# Altium PCB BRK7010.PcbDoc
Units mil, origin at the board's own origin, x right, y up, seen from the top; angles counter-clockwise.
Board outline 4724.41 x 3149.61 mil, 2 copper layers (Top Layer, Bottom Layer), stack 60.5 mil thick; 29 components, 139 nets, 372 pads, 81 vias.
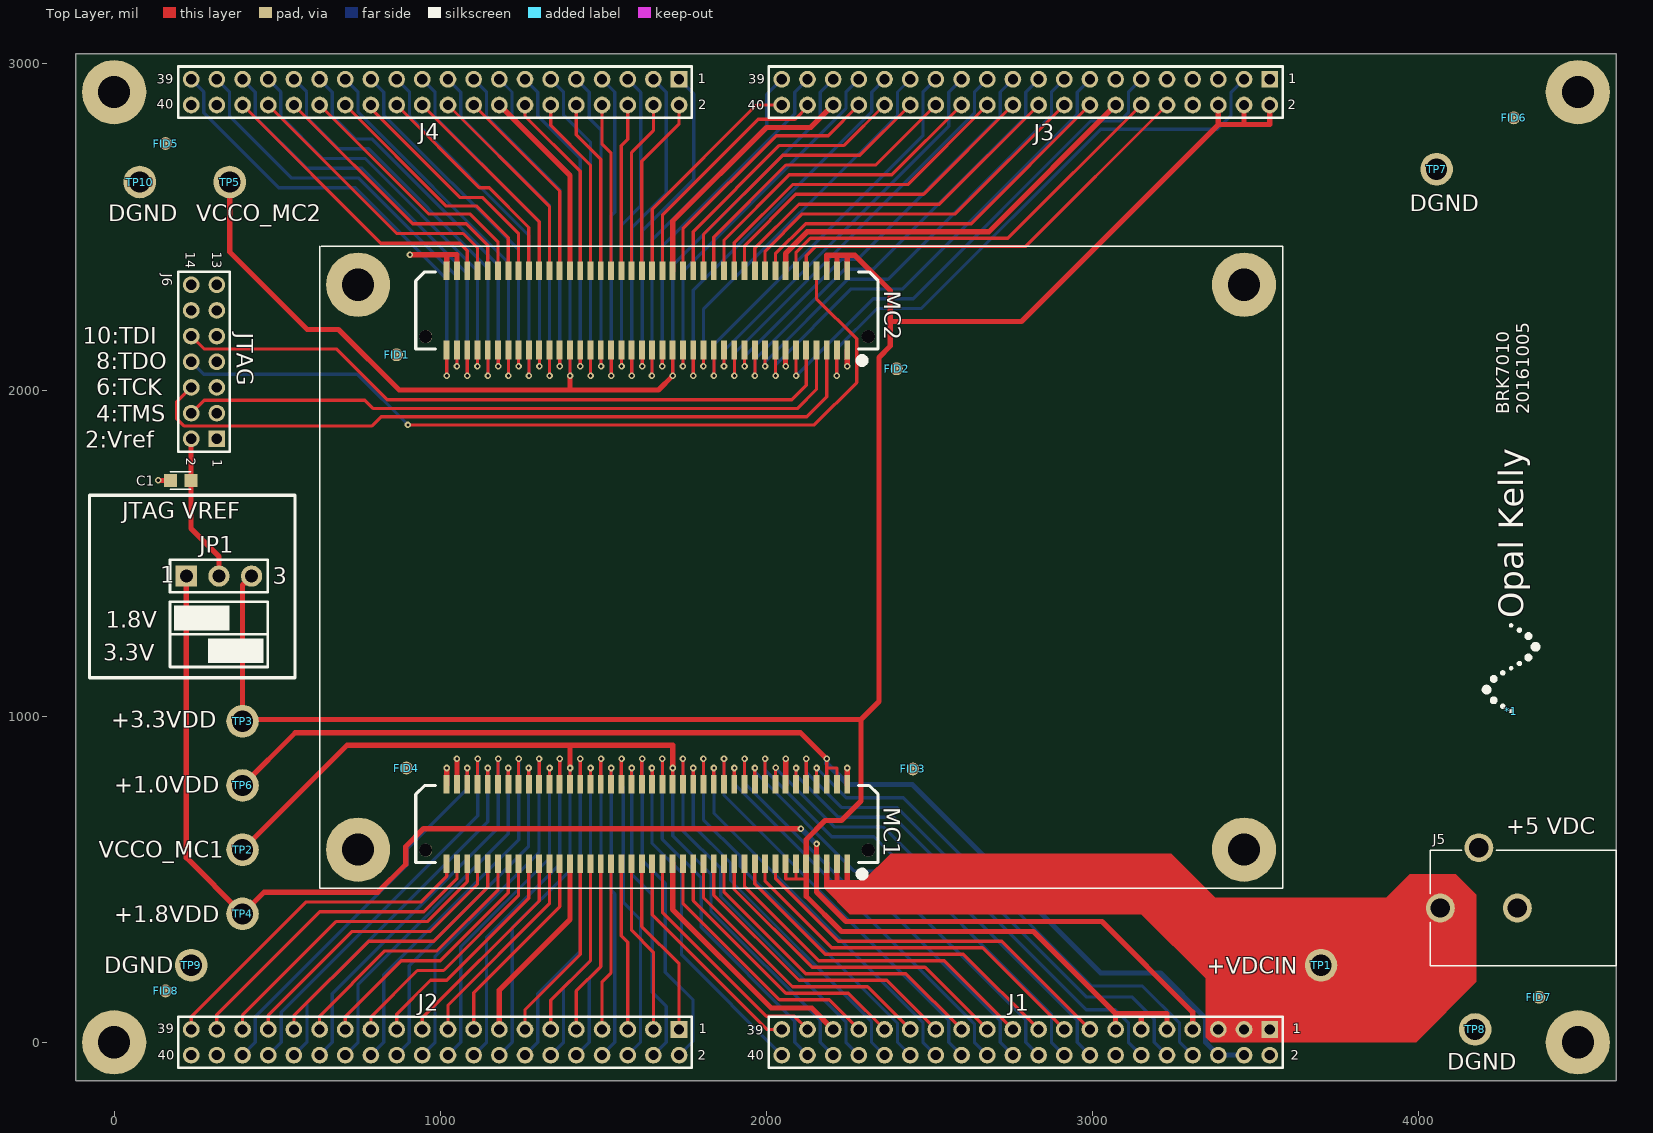
[diagram p0: Top Layer view]
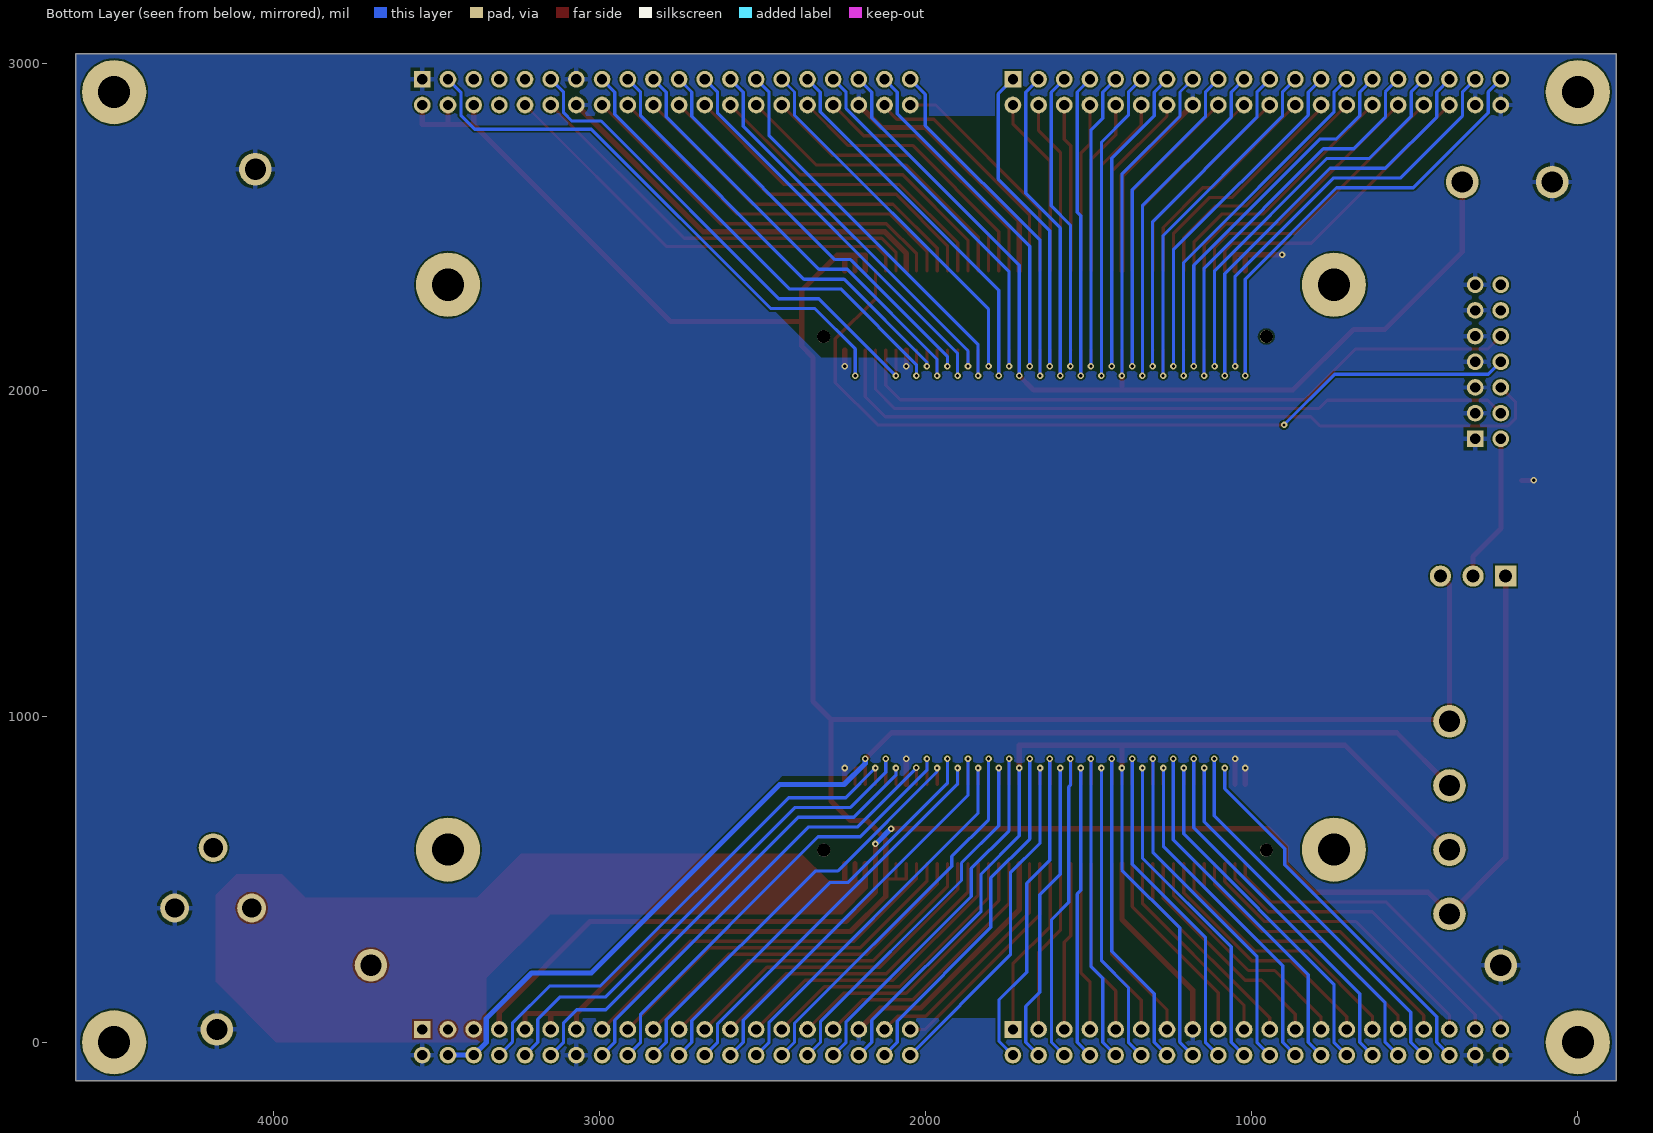
[diagram p1: Bottom Layer view, seen from below]

## Layer stack, top to bottom
Top Solder: solder mask 0.4, Solder Resist, Dk 3.5
Top Layer: signal copper 1.4
Dielectric1: core 57.7, IT-180A, Dk 4.8
Bottom Layer: signal copper 1.4
Bottom Solder: solder mask 0.4, Solder Resist, Dk 3.5

## Board outline
-118.11,-118.11 -118.11,3031.5 4606.3,3031.5 4606.3,-118.11

## Design rules (kind name [scope] priority, off if disabled: settings)
Clearance [All] p1: gap=5 ignorepadtopadclearanceinfootprint=FALSE except(0: Arc-Hole Track-Hole SMDPad-Hole THPad-Hole Via-Hole Fill-Hole Poly-Hole Region-Hole Text-Hole; 15: Fill-Fill Fill-Poly Fill-Region Poly-Poly Poly-Region Region-Region)
FabricationTestPointUsage TestPointUsage [All] p1: valid=0 allowmultiple=FALSE
FabricationTestpoint Testpoint [All] p1: side=3 testpointundercomponent=TRUE minsize=40 maxsize=100 preferedsize=60 minholesize=0 maxholesize=40 preferedholesize=32 testpointgrid=1 allowsidetop=TRUE allowsidebottom=TRUE usegrid=TRUE gridtolerance=0.01
HoleSize [All] p1: absolutevalues=TRUE maxlimit=236.22 minlimit=10 maxpercent=80.000 minpercent=20.000
MinimumSolderMaskSliver [All] p1: minsoldermaskwidth=3
PlaneConnect [All] p1: planeconnectstyle=Relief reliefexpansion=20 reliefentries=4 reliefconductorwidth=15 reliefairgap=10
PolygonConnect "Via Connect" [IsVia] p1: connectstyle=Direct reliefconductorwidth=10 reliefentries=4 polygonreliefangle="90 Angle" airgapwidth=10
PolygonConnect [All] p2: connectstyle=Relief reliefconductorwidth=15 reliefentries=4 polygonreliefangle="90 Angle" airgapwidth=10
RoutingVias [All] p1: holewidth=15 width=25 viastyle="Through Hole" minholewidth=10 minwidth=20 maxholewidth=50 maxwidth=100
SilkToSilkClearance [All] p1: silktosilkclearance=0.1
SilkToSolderMaskClearance SilkscreenOverComponentPads [IsPad] p1: minsilkscreentomaskgap=3 clearancetoexposedcopper=TRUE
SolderMaskExpansion [All] p1: expansion=4
Width okWidthPower [InNetClass('Power')] p1: maxlimit=100 minlimit=10 preferedwidth=10 minimp=50.000000 maximp=50.000000 favimp=50.000000
Width [All] p2: maxlimit=40 minlimit=6 preferedwidth=7 minimp=50.000000 maximp=50.000000 favimp=50.000000
23 further rules are at their usual default settings.

## Components (designator, comment, footprint, x,y, rotation, side; value= is the part's Value field where it differs from the comment)
*1 "Opal Kelly Logo" okLogo-23x5 4283.46,1015.75 r90 top
C1 "C0603C104K4RACTU" CAPC1608N 204,1723 r0 top value="0.1 u"
FID1 "FIDUCIAL" FID1MM/2MM-SS 866,2108 r90 top
FID2 "FIDUCIAL" FID1MM/2MM-SS 2399,2065 r90 top
FID3 "FIDUCIAL" FID1MM/2MM-SS 2449,838 r90 top
FID4 "FIDUCIAL" FID1MM/2MM-SS 896,841 r90 top
FID5 "FIDUCIAL" FID1MM/2MM-SS 157.48,2755.91 r90 top
FID6 "FIDUCIAL" FID1MM/2MM-SS 4291.34,2834.65 r90 top
FID7 "FIDUCIAL" FID1MM/2MM-SS 4369,138 r90 top
FID8 "FIDUCIAL" FID1MM/2MM-SS 157.48,157.48 r90 top
J1 "0877584016" HDR2X20-2MM 2795.28,0 r180 top locked
J2 "0877584016" HDR2X20-2MM 984.25,0 r180 top locked
J3 "0877584016" HDR2X20-2MM 2795.28,2913.39 r180 top locked
J4 "0877584016" HDR2X20-2MM 984.25,2913.39 r180 top locked
J5 "PJ-102AH" CUI-PJ102A 4605.83,411.5 r90 top
J6 "87831-1420" HDR2X7-2MM 275.59,2086.61 r90 top
JP1 "PBC03SAAN" HDR1X3 221.33,1429.58 r0 top
MC1 "BTE-040-01-F-D-A" BTE-040 1633.86,669.29 r180 top locked
MC2 "BTE-040-01-F-D-A" BTE-040 1633.86,2244.09 r180 top locked
TP1 "+VDCIN" TP-PTH-65/100 3700.79,236.22 r90 top
TP2 "VCCO_MC1" TP-PTH-65/100 393.7,590.55 r90 top
TP3 "+3.3VDD" TP-PTH-65/100 393.7,984.25 r90 top
TP4 "+1.8VDD" TP-PTH-65/100 393.7,393.7 r90 top
TP5 "VCCO_MC2" TP-PTH-65/100 354.33,2637.8 r90 top
TP6 "+1.0VDD" TP-PTH-65/100 393.7,787.4 r90 top
TP7 "DGND" TP-PTH-65/100 4055.12,2677.17 r90 top
TP8 "DGND" TP-PTH-65/100 4173.23,39.37 r90 top
TP9 "DGND" TP-PTH-65/100 236.22,236.22 r90 top
TP10 "DGND" TP-PTH-65/100 78.74,2637.8 r90 top

## Footprints (in the part's own frame and the unit in brackets; to place one, negate y for a bottom-side part, rotate by r counter-clockwise, add the part's x,y. Pads: shape width x height; smd on the part's side, far side on the other; paste and mask are expansions set on the pad)
BTE-040 [mm] "0.8mm Samtech socket"
  rect 0.46x1.45 smd: 1(-15.6,3.085) 2(-15.6,-3.085) 3(-14.8,3.085) 4(-14.8,-3.085) 5(-14,3.085) 6(-14,-3.085) 7(-13.2,3.085) 8(-13.2,-3.085) 9(-12.4,3.085) 10(-12.4,-3.085) 11(-11.6,3.085) 12(-11.6,-3.085) 13(-10.8,3.085) 14(-10.8,-3.085) 15(-10,3.085) 16(-10,-3.085) 17(-9.2,3.085) 18(-9.2,-3.085) 19(-8.4,3.085) 20(-8.4,-3.085) 21(-7.6,3.085) 22(-7.6,-3.085) 23(-6.8,3.085) 24(-6.8,-3.085) 25(-6,3.085) 26(-6,-3.085) 27(-5.2,3.085) 28(-5.2,-3.085) 29(-4.4,3.085) 30(-4.4,-3.085) 31(-3.6,3.085) 32(-3.6,-3.085) 33(-2.8,3.085) 34(-2.8,-3.085) 35(-2,3.085) 36(-2,-3.085) 37(-1.2,3.085) 38(-1.2,-3.085) 39(-0.4,3.085) 40(-0.4,-3.085) 41(0.4,3.085) 42(0.4,-3.085) 43(1.2,3.085) 44(1.2,-3.085) 45(2,3.085) 46(2,-3.085) 47(2.8,3.085) 48(2.8,-3.085) 49(3.6,3.085) 50(3.6,-3.085) 51(4.4,3.085) 52(4.4,-3.085) 53(5.2,3.085) 54(5.2,-3.085) 55(6,3.085) 56(6,-3.085) 57(6.8,3.085) 58(6.8,-3.085) 59(7.6,3.085) 60(7.6,-3.085) 61(8.4,3.085) 62(8.4,-3.085) 63(9.2,3.085) 64(9.2,-3.085) 65(10,3.085) 66(10,-3.085) 67(10.8,3.085) 68(10.8,-3.085) 69(11.6,3.085) 70(11.6,-3.085) 71(12.4,3.085) 72(12.4,-3.085) 73(13.2,3.085) 74(13.2,-3.085) 75(14,3.085) 76(14,-3.085) 77(14.8,3.085) 78(14.8,-3.085) 79(15.6,3.085) 80(15.6,-3.085)
  round 1.02 hole 1.02: 81(-17.235,2.035) 82(17.235,2.035)
  silkscreen extent -18,-3 18,4.15
CAPC1608N [mm] "Chip Capacitor, Body 1.6x0.8mm, IPC Medium Density"
  rect 1x1 smd: 1(-0.8,0) 2(0.8,0)
  silkscreen extent -0.8,-0.68 0.8,0.68, body extent -0.87,-0.48 0.87,0.48, height 0.85
CUI-PJ102A [mm] "2.1mm/5.5mm DC power jack"
  round 2.25 hole 1.5: 1(0,13.7) 2(0,7.7) 3(4.7,10.7)
  silkscreen extent -4.5,0 4.5,14.5
FID1MM/2MM-SS [mm] "Fiducial 1mm copper, 2mm soldermask, single-side"
  round 1 smd paste-0.5 mask+0.5: FID?(0,0)
HDR1X3 [mil] ".1\" 1x3 Header"
  rect 65x65 hole 40: 1(0,0)
  round 65 hole 40: 2(100,0) 3(200,0)
  silkscreen extent -50,-50 250,50
HDR2X7-2MM [mm] "2mm 2x7 header"
  rect 1.3x1.3 hole 0.8: 1(-6,-1)
  round 1.3 hole 0.8: 2(-6,1) 3(-4,-1) 4(-4,1) 5(-2,-1) 6(-2,1) 7(0,-1) 8(0,1) 9(2,-1) 10(2,1) 11(4,-1) 12(4,1) 13(6,-1) 14(6,1)
  silkscreen extent -7,-2 7,2
HDR2X20-2MM [mm] "2mm 2x20 header"
  rect 1.3x1.3 hole 0.8: 1(-19,-1)
  round 1.3 hole 0.8: 2(-19,1) 3(-17,-1) 4(-17,1) 5(-15,-1) 6(-15,1) 7(-13,-1) 8(-13,1) 9(-11,-1) 10(-11,1) 11(-9,-1) 12(-9,1) 13(-7,-1) 14(-7,1) 15(-5,-1) 16(-5,1) 17(-3,-1) 18(-3,1) 19(-1,-1) 20(-1,1) 21(1,-1) 22(1,1) 23(3,-1) 24(3,1) 25(5,-1) 26(5,1) 27(7,-1) 28(7,1) 29(9,-1) 30(9,1) 31(11,-1) 32(11,1) 33(13,-1) 34(13,1) 35(15,-1) 36(15,1) 37(17,-1) 38(17,1) 39(19,-1) 40(19,1)
  silkscreen extent -20,-2 20,2
okLogo-23x5 [mil] "Opal Kelly silkscreen logo (23mm x 5mm)"
  silkscreen extent -3,-82 266,82
TP-PTH-65/100 [mil] "Test point, plated through-hole, 65/100mil"
  round 100 hole 65: 1(0,0)

## Part data
*1: library part OKLOGO
C1: library part 000019, "Ceramic capacitor", Manufacturer=Kemet, ValueFloat=1E-7, Description 2="SM-0603, 10%, 16v, X7R", Manufacturer_PN=C0603C104K4RACTU, partnumber=000019, updated_on="11/23/2015 9:32:03 AM"
FID1 FID2 FID3 FID4 FID5 FID6 FID7 FID8: "PCB fiducial"
J1 J2 J3 J4: library part 000583, "2mm header, 20x2, thru-hole", Manufacturer=Molex, Manufacturer_PN=0877584016, NoLoad=NoLoad, partnumber=000583, updated_on="1/24/2015 12:30:40 PM"
J5: library part 000356, "DC power connector - high current", Manufacturer="CUI Inc.", Description 2="2.1mm / 5.5mm", Manufacturer_PN=PJ-102AH, partnumber=000356, updated_on="3/10/2016 9:16:59 AM"
J6: library part 000541, "2mm header, shrouded", Manufacturer=Molex, Description 2="Dual-row, 14-pos, Xilinx JTAG compatible", Manufacturer_PN=87831-1420, partnumber=000541, updated_on="9/27/2016 12:10:17 PM"
JP1: library part 001173, "Single-row header", Manufacturer="Sullins Electronics Corp.", Description 2="Male, 0.1\", 3-pos", Manufacturer_PN=PBC03SAAN, partnumber=001173, updated_on="1/24/2015 12:32:02 PM"
MC1 MC2: library part 000059, "0.8mm high-density header", Manufacturer=Samtec, Description 2="80-pin, Gold flash, Mated height: 5.00mm (0.197 inch)", Manufacturer_PN=BTE-040-01-F-D-A, partnumber=000059, updated_on="1/18/2016 3:47:24 PM"
TP1 TP2 TP3 TP4 TP5 TP6 TP7 TP8 TP9 TP10: library part TP-PTH-65/100, "Test point, plated through-hole, 65/100mil"

## Free pads (board coordinates)
  round 196.85 hole 98.43: 0(0,0) 0(0,2913.39) 0(4488.19,0) 0(4488.19,2913.39) MH(748.03,590.55) MH(748.03,2322.83) MH(3464.57,590.55) MH(3464.57,2322.83)

## Via types
v1: diameter 20, hole 10, Top Layer to Bottom Layer, 81 vias

## Nets (pads, with @x,y where several pads share a name; then routed paths per layer and width w, separated by ;. In a path a pad name is that pad's centre, name@x,y a point inside that pad or via, vN(x,y) a via of type N, cw(c..) or ccw(c..) an arc to the next point about the centre after c; other vN are vias at no path point)
+1.0VDD: J1.4 J1.6 MC1.4 MC1.6 TP6.1 | length 3758.5
  Top Layer w10: MC1.6 2185.04,841 ; v1(2185,869) v1(2185,869) 2185.04,841 ; MC1.4 2216.54,841 2185.04,841
  Top Layer w16: TP6.1 555.3,949 2105,949 v1(2185,869)
  Bottom Layer w16: v1(2185,869) 2185,855 2250,790 2447,790 3025,212 3208,212 3347,73 3347,-0.54 J1.6 J1.4
+1.8VDD: J1.7 JP1.1 MC1.7 TP4.1 | length 4533.4
  Top Layer w16: JP1.1 221.33,566.07 TP4.1 460,460 808,460 894,546 894,600 949,655 v1(2106,655) ; v1(2154,608) 2153.54,607.54 MC1.7 2153.54,460.46 2244,370 3029,370 3307.09,91.91 J1.7
  Bottom Layer w16: v1(2106,655) 2153,608 v1(2154,608)
+3.3VDD: J1.9 J1.11 J1.13 J3.2 J3.4 J3.6 JP1.3 MC1.9 MC1.11 MC1.13 MC2.2 MC2.4 MC2.6 TP3.1 | length 7883
  Top Layer w10: MC1.13 2059.05,501 2090.55,501 ; MC1.11 2090.55,501 ; 2122.05,501 2090.55,501
  Top Layer w16: JP1.3 393.7,1401.95 TP3.1 399.45,990 2290,990 ; MC2.6 2185.04,2413 2216.54,2413 ; MC2.4 2216.54,2413 ; MC2.2 2248.03,2413 ; J1.13 3070.87,88.13 ; J1.11 3149.61,88.13 ; J1.9 3228.35,88.13 3149.61,88.13 ; J3.6 3385.83,2813.83 ; J3.4 3464.57,2813.83 ; J3.2 3543.31,2813.83 3464.57,2813.83 ; 2216.54,2413 2248.03,2413 ; 2248.03,2413 2272,2413 2380,2305 2380,2210 ; 2290,990 2345,1045 2345,2100 2380,2135 2380,2210 ; 2290,990 2290,740 2230,680 2180,680 2122.05,622.05 MC1.9 2122.05,501 2122.05,447.95 2230,340 2819,340 3070.87,88.13 ; 2380,2210 2782,2210 3385.83,2813.83 ; 3070.87,88.13 3149.61,88.13 ; 3385.83,2813.83 3464.57,2813.83
+VCCBATT: J3.3 MC2.3 | length 1793.6
  Top Layer w10: v1(2216,2044) 2216,2122.1 MC2.3
  Bottom Layer w10: v1(2216,2044) 2216,2126 2340,2250 2475,2250 3025,2800 3383,2800 3425,2842 3425,2913.19 J3.3
+VDCIN: J1.1 J1.3 J1.5 J5.1 MC1.1 MC1.3 MC1.5 TP1.1 | length 2346.7
  Top Layer w16: MC1.5 2185.04,480.96 2214,452 ; MC1.3 2216.54,454.54 2214,452 ; MC1.1 2248.03,426.03 2244,422 ; J5.1 3891.18,236.22 TP1.1 3515.01,422 2244,422 ; 2214,452 2244,422
DGND: C1.1 J1.2 J1.14 J1.35 J2.15 J2.38 J2.40 J3.1 J3.13 J3.14 J3.36 J4.16 J4.38 J4.40 J5.2 J6.1 J6.3 J6.5 J6.7 J6.9 J6.11 J6.13 MC1.2 MC1.14 MC1.35 MC1.55 MC1.78 MC1.80 MC2.1 MC2.13 MC2.14 MC2.36 MC2.56 MC2.78 MC2.80 TP7.1 TP8.1 TP9.1 TP10.1 | length 4663.9
  Top Layer w16: v1(135,1723) C1.1 ; v1(907,2415) 1018.11,2415 ; MC1.80 1019.68,840.68 v1(1020,841) ; MC2.80 1019.68,2415.71 1051.18,2415.71 MC2.78 ; v1(1051,869) 1051.18,868.82 MC1.78 ; J2.15 1181.1,160.1 1397.64,376.64 MC1.55 ; J4.16 1397.64,2657.48 MC2.56 ; MC1.35 1712.6,407.4 2015,105 2139.09,105 J1.35 ; MC2.36 1712.6,2517.6 2000,2805 2135.71,2805 J3.36 ; v1(2059,869) v1(2059,869) MC1.14 ; v1(2059,2073) 2059,2122.58 MC2.13 ; MC2.14 2059.05,2419.05 2125,2485 2681.85,2485 J3.14 ; MC1.2 v1(2248,841) ; v1(2248,2073) MC2.1@2248,2122.61
FPGA_TCK: J6.6 MC2.5 | length 2297.7
  Top Layer w10: J6.6 191,1962.65 191,1913 214,1890 791,1890 819,1918 2124.04,1918 2185.04,1979 MC2.5
FPGA_TDI: J6.10 MC2.9 | length 2093.6
  Top Layer w10: J6.10 275.57,2126 681,2126 837,1970 2078.05,1970 2122.05,2014 MC2.9
FPGA_TDO: J6.8 MC2.8 | length 2568.5
  Top Layer w10: v1(901,1893) 2147,1893 2277,2023 2277,2157 2153.54,2280.46 MC2.8
  Bottom Layer w10: J6.8 274.83,2048 746,2048 v1(901,1893)
FPGA_TMS: J6.4 MC2.7 | length 2089.9
  Top Layer w10: J6.4 276.09,1969 769,1969 795,1943 2095,1943 2153.54,2001.54 MC2.7
MC1_15: J1.15 MC1.15 | length 1201.8
  Top Layer w10: MC1.15 2027.56,502.44 2220,310 2721.5,310 J1.15
MC1_16: J1.16 MC1.16 | length 1420.6
  Top Layer w10: MC1.16 2027.56,840.56 v1(2029,842)
  Bottom Layer w10: v1(2029,842) 2029,840 2209,660 2360,660 2953,67 2953,-0.24 J1.16
MC1_17: J1.17 MC1.17 | length 1159.5
  Top Layer w10: MC1.17 1996.06,493.94 2200,290 2662.76,290 J1.17
MC1_18: J1.18 MC1.18 | length 1442.8
  Top Layer w10: v1(1996,869) v1(1996,869) MC1.18
  Bottom Layer w10: v1(1996,869) 1996,834 2200,630 2330,630 2874,86 2874,0.02 J1.18
MC1_19: J1.19 MC1.19 | length 1117.2
  Top Layer w10: MC1.19 1964.57,485.43 2180,270 2604.02,270 J1.19
MC1_20: J1.20 MC1.20 | length 1331.4
  Top Layer w10: MC1.20 1964.57,840.57 v1(1965,841)
  Bottom Layer w10: v1(1965,841) 1965,830 2270,525 2339,525 2795,69 2795,0.28 J1.20
MC1_21: J1.21 MC1.21 | length 1075
  Top Layer w10: MC1.21 1933.07,476.93 2160,250 2545.28,250 J1.21
MC1_22: J1.22 MC1.22 | length 1360.3
  Top Layer w10: v1(1933,869) 1933.07,868.93 MC1.22
  Bottom Layer w10: v1(1933,869) 1933,794 2237,490 2293,490 2717,66 2717,-0.46 J1.22
MC1_23: J1.23 MC1.23 | length 1032.7
  Top Layer w10: MC1.23 1901.57,468.43 2140,230 2486.54,230 J1.23
MC1_24: J1.24 MC1.24 | length 1251.9
  Top Layer w10: MC1.24 1901.57,840.57 v1(1902,841)
  Bottom Layer w10: v1(1902,841) 1902,793 2638,57 2638,-0.2 J1.24
MC1_25: J1.25 MC1.25 | length 990.5
  Top Layer w10: MC1.25 1870.08,459.92 2120,210 2427.8,210 J1.25
MC1_26: J1.26 MC1.26 | length 1288.4
  Top Layer w10: v1(1870,869) 1870.08,868.92 MC1.26
  Bottom Layer w10: v1(1870,869) 1870,757 2559,68 2559,0.06 J1.26
MC1_27: J1.27 MC1.27 | length 948.2
  Top Layer w10: MC1.27 1838.58,451.42 2100,190 2369.06,190 J1.27
MC1_28: J1.28 MC1.28 | length 1212.7
  Top Layer w10: MC1.28 1838.58,840.58 v1(1839,841)
  Bottom Layer w10: v1(1839,841) 1839,703 2480,62 2480,0.32 J1.28
MC1_29: J1.29 MC1.29 | length 905.9
  Top Layer w10: MC1.29 1807.09,442.91 2080,170 2310.32,170 J1.29
MC1_30: J1.30 MC1.30 | length 1249.2
  Top Layer w10: v1(1807,869) 1807.09,868.91 MC1.30
  Bottom Layer w10: v1(1807,869) 1807,683 1920,570 1920,540 2402,58 2402,-0.43 J1.30
MC1_31: J1.31 MC1.31 | length 863.7
  Top Layer w10: MC1.31 1775.59,434.41 2060,150 2251.57,150 J1.31
MC1_32: J1.32 MC1.32 | length 1173.6
  Top Layer w10: MC1.32 1775.59,840.59 v1(1776,841)
  Bottom Layer w10: v1(1776,841) 1776,664 1890,550 1890,496 2322,64 2322,0.83 J1.32
MC1_33: J1.33 MC1.33 | length 821.4
  Top Layer w10: MC1.33 1744.09,425.91 2040,130 2192.83,130 J1.33
MC1_34: J1.34 MC1.34 | length 1210.1
  Top Layer w10: v1(1744,869) 1744.09,868.91 MC1.34
  Bottom Layer w10: v1(1744,869) 1744,649 1860,533 1860,447 2244,63 2244,0.09 J1.34
MC1_37: J1.37 MC1.37 | length 742.7
  Top Layer w10: MC1.37 1681.1,398.9 2000,80 2085.35,80 J1.37
MC1_38: J1.38 MC1.38 | length 1171
  Top Layer w10: v1(1681,869) 1681.1,868.9 MC1.38
  Bottom Layer w10: v1(1681,869) 1681,623 1800,504 1800,352 2087,65 2087,-0.39 J1.38
MC1_39: J1.39 MC1.39 | length 700.5
  Top Layer w10: MC1.39 1649.61,390.39 2000.63,39.37 J1.39
MC1_40: J1.40 MC1.40 | length 1095.8
  Top Layer w10: v1(1649,841) 1649.61,840.39 MC1.40
  Bottom Layer w10: v1(1649,841) 1649,611 1740,520 1740,267.87 J1.40
MC1_41: J2.1 MC1.41 | length 555.8
  Top Layer w10: MC1.41 1618.11,354.89 1732.28,240.72 J2.1
MC1_42: J2.2 MC1.42 | length 1069.3
  Top Layer w10: MC1.42 1618.11,868.11 v1(1619,869)
  Bottom Layer w10: v1(1619,869) 1619,558 1690,487 1690,215 1775,130 1775,3.35 J2.2
MC1_43: J2.3 MC1.43 | length 536.2
  Top Layer w10: MC1.43 1586.61,343.39 1653.54,276.46 J2.3
MC1_44: J2.4 MC1.44 | length 991
  Top Layer w10: MC1.44 1586.61,840.61 v1(1587,841)
  Bottom Layer w10: v1(1587,841) 1587,515 1650,452 1650,153 1693,110 1693,0.09 J2.4
MC1_45: J2.5 MC1.45 | length 516.6
  Top Layer w10: MC1.45 1555.12,326.88 1574.8,307.2 J2.5
MC1_46: J2.6 MC1.46 | length 1027.2
  Top Layer w10: MC1.46 1555.12,868.12 v1(1556,869)
  Bottom Layer w10: v1(1556,869) 1556,788 1561,783 1561,429 1614,376 1614,-0.17 J2.6
MC1_47: J2.7 MC1.47 | length 519.9
  Top Layer w10: J2.7 1496.06,186.06 1523.62,213.62 MC1.47
MC1_48: J2.8 MC1.48 | length 951.5
  Top Layer w10: MC1.48 1523.62,840.62 v1(1524,841)
  Bottom Layer w10: J2.8 1535,-0.43 1535,455 1524,466 v1(1524,841)
MC1_49: J2.9 MC1.49 | length 539.4
  Top Layer w10: J2.9 1417.32,157.32 1492.13,232.13 MC1.49
MC1_50: J2.10 MC1.50 | length 1018.3
  Top Layer w10: MC1.50 1492.13,868.13 v1(1493,869)
  Bottom Layer w10: J2.10 1457,0.31 1457,197 1493,233 v1(1493,869)
MC1_51: J2.11 MC1.51 | length 559
  Top Layer w10: J2.11 1338.58,128.58 1460.63,250.63 MC1.51
MC1_52: J2.12 MC1.52 | length 981.5
  Top Layer w10: MC1.52 1460.63,840.63 v1(1461,841)
  Bottom Layer w10: J2.12 1378,0.05 1378,168 1461,251 v1(1461,841)
MC1_53: J2.13 MC1.53 | length 578.6
  Top Layer w10: J2.13 1259.84,99.84 1429.13,269.13 MC1.53
MC1_54: J2.14 MC1.54 | length 1056.7
  Top Layer w10: v1(1429,869) 1429.13,868.87 MC1.54
  Bottom Layer w10: J2.14 1299,-0.21 1299,149 1429,279 v1(1429,869)
MC1_57: J2.17 MC1.57 | length 617.7
  Top Layer w10: J2.17 1102.36,152.36 1366.14,416.14 MC1.57
MC1_58: J2.18 MC1.58 | length 1095.9
  Top Layer w10: v1(1366,869) 1366.14,868.86 MC1.58
  Bottom Layer w10: J2.18 1142,0.27 1142,322 1366,546 v1(1366,869)
MC1_59: J2.19 MC1.59 | length 637.3
  Top Layer w10: J2.19 1023.62,113.62 1334.65,424.65 MC1.59
MC1_60: J2.20 MC1.60 | length 1059.7
  Top Layer w10: MC1.60 1334.65,840.65 v1(1335,841)
  Bottom Layer w10: J2.20 1063,0.01 1063,293 1335,565 v1(1335,841)
MC1_61: J2.21 MC1.61 | length 656.9
  Top Layer w10: J2.21 944.88,74.88 1303.15,433.15 MC1.61
MC1_62: J2.22 MC1.62 | length 1135
  Top Layer w10: v1(1303,869) 1303.15,868.85 MC1.62
  Bottom Layer w10: J2.22 984,-0.25 984,264 1303,583 v1(1303,869)
MC1_63: J2.23 MC1.63 | length 705.7
  Top Layer w10: J2.23 866.14,86.14 970,190 1020,190 1271.65,441.65 MC1.63
MC1_64: J2.24 MC1.64 | length 1098.6
  Top Layer w10: v1(1270.79,841) 1271.65,840.13 MC1.64
  Bottom Layer w10: J2.24 905,-0.51 905,235 1270.79,600.79 v1(1270.79,841)
MC1_65: J2.25 MC1.65 | length 742.9
  Top Layer w10: J2.25 787.4,77.4 930,220 1010,220 1240.16,450.16 MC1.65
MC1_66: J2.26 MC1.66 | length 1174.7
  Top Layer w10: MC1.66 1240.16,868.37 v1(1240.79,869)
  Bottom Layer w10: J2.26 827,0.23 827,207 1240.79,620.79 v1(1240.79,869)
MC1_67: J2.27 MC1.67 | length 785.9
  Top Layer w10: J2.27 708.66,78.66 880,250 1000,250 1208.66,458.66 MC1.67
MC1_68: J2.28 MC1.68 | length 1137.8
  Top Layer w10: MC1.68 1208.66,840.87 v1(1208.79,841)
  Bottom Layer w10: J2.28 748,-0.03 748,178 1208.79,638.79 v1(1208.79,841)
MC1_69: J2.29 MC1.69 | length 828.9
  Top Layer w10: J2.29 629.92,79.92 830,280 990,280 1177.17,467.17 MC1.69
MC1_70: J2.30 MC1.70 | length 1213.8
  Top Layer w10: MC1.70 1177.17,868.38 v1(1177.79,869)
  Bottom Layer w10: J2.30 669,-0.29 669,149 1177.79,657.79 v1(1177.79,869)
MC1_71: J2.31 MC1.71 | length 871.9
  Top Layer w10: J2.31 551.18,81.18 780,310 980,310 1145.67,475.67 MC1.71
MC1_72: J2.32 MC1.72 | length 1177
  Top Layer w10: MC1.72 1145.67,840.88 v1(1145.79,841)
  Bottom Layer w10: J2.32 591,0.45 591,121 1145.79,675.79 v1(1145.79,841)
MC1_73: J2.33 MC1.73 | length 914.9
  Top Layer w10: J2.33 472.44,82.44 730,340 970,340 1114.17,484.17 MC1.73
MC1_74: J2.34 MC1.74 | length 1252.9
  Top Layer w10: MC1.74 1114.17,868.39 v1(1114.79,869)
  Bottom Layer w10: J2.34 512,0.19 512,92 1114.79,694.79 v1(1114.79,869)
MC1_75: J2.35 MC1.75 | length 957.9
  Top Layer w10: J2.35 393.7,83.7 680,370 960,370 1082.68,492.68 MC1.75
MC1_76: J2.36 MC1.76 | length 1216.1
  Top Layer w10: MC1.76 1082.68,840.89 v1(1082.79,841)
  Bottom Layer w10: J2.36 433,-0.07 433,78 899,544 899,594 1082.79,777.79 v1(1082.79,841)
MC1_77: J2.37 MC1.77 | length 1000.9
  Top Layer w10: J2.37 314.96,84.96 630,400 950,400 1051.18,501.18 MC1.77
MC1_79: J2.39 MC1.79 | length 1039.5
  Top Layer w10: J2.39 236.22,78.74 587.48,430 940,430 1019.68,509.68 MC1.79
MC2_10: J3.10 MC2.10 | length 1344.1
  Top Layer w10: MC2.10 2122.05,2412.05 2150,2440 2794.33,2440 J3.10
MC2_12: J3.12 MC2.12 | length 1301.9
  Top Layer w10: MC2.12 2090.55,2420.55 2135,2465 2740.59,2465 J3.12
MC2_15: J3.15 MC2.15 | length 1479.5
  Top Layer w10: MC2.15 2028,2122.2 v1(2028,2044)
  Bottom Layer w10: v1(2028,2044) 2028,2078 2260,2310 2418,2310 2953,2845 2953,2913.63 J3.15
MC2_16: J3.16 MC2.16 | length 1205.6
  Top Layer w10: MC2.16 2027.56,2417.56 2120,2510 2628.11,2510 J3.16
MC2_17: J3.17 MC2.17 | length 1381.5
  Top Layer w10: v1(1996,2073) 1996,2122.57 MC2.17
  Bottom Layer w10: v1(1996,2073) 1996,2086 2250,2340 2373,2340 2874,2841 2874,2913.37 J3.17
MC2_18: J3.18 MC2.18 | length 1163.4
  Top Layer w10: MC2.18 1996.06,2426.06 2110,2540 2579.37,2540 J3.18
MC2_19: J3.19 MC2.19 | length 1398.8
  Top Layer w10: MC2.19 1965,2122.2 v1(1965,2044)
  Bottom Layer w10: v1(1965,2044) 1965,2095 2240,2370 2327,2370 2795,2838 2795,2913.11 J3.19
MC2_20: J3.20 MC2.20 | length 1121.1
  Top Layer w10: MC2.20 1964.57,2434.57 2100,2570 2530.63,2570 J3.20
MC2_21: J3.21 MC2.21 | length 1298.4
  Top Layer w10: v1(1933,2073) 1933,2122.57 MC2.21
  Bottom Layer w10: v1(1933,2073) 1933,2103 2230,2400 2278,2400 2717,2839 2717,2913.85 J3.21
MC2_22: J3.22 MC2.22 | length 1078.9
  Top Layer w10: MC2.22 1933.07,2443.07 2090,2600 2481.89,2600 J3.22
MC2_23: J3.23 MC2.23 | length 1308.7
  Top Layer w10: MC2.23 1902,2122.21 v1(1902,2044)
  Bottom Layer w10: v1(1902,2044) 1902,2112 2638,2848 2638,2913.59 J3.23
MC2_24: J3.24 MC2.24 | length 1036.6
  Top Layer w10: MC2.24 1901.57,2451.57 2080,2630 2433.15,2630 J3.24
MC2_25: J3.25 MC2.25 | length 1231.1
  Top Layer w10: v1(1870,2073) 1870,2122.56 MC2.25
  Bottom Layer w10: v1(1870,2073) 1870,2120 2559,2809 2559,2913.33 J3.25
MC2_26: J3.26 MC2.26 | length 994.3
  Top Layer w10: MC2.26 1870.08,2460.08 2070,2660 2384.41,2660 J3.26
MC2_27: J3.27 MC2.27 | length 1269.5
  Top Layer w10: MC2.27 1839,2122.22 v1(1839,2044)
  Bottom Layer w10: v1(1839,2044) 1839,2139 2480,2780 2480,2913.07 J3.27
MC2_28: J3.28 MC2.28 | length 952.1
  Top Layer w10: MC2.28 1838.58,2468.58 2060,2690 2335.67,2690 J3.28
MC2_29: J3.29 MC2.29 | length 1192
  Top Layer w10: v1(1807,2073) 1807,2122.55 MC2.29
  Bottom Layer w10: v1(1807,2073) 1807,2247 2402,2842 2402,2913.81 J3.29
MC2_30: J3.30 MC2.30 | length 909.8
  Top Layer w10: MC2.30 1807.09,2477.09 2050,2720 2286.93,2720 J3.30
MC2_31: J3.31 MC2.31 | length 1230.4
  Top Layer w10: MC2.31 1776,2122.23 v1(1776,2044)
  Bottom Layer w10: v1(1776,2044) 1776,2306 2323,2853 2323,2913.55 J3.31
MC2_32: J3.32 MC2.32 | length 867.5
  Top Layer w10: MC2.32 1775.59,2485.59 2040,2750 2238.19,2750 J3.32
MC2_33: J3.33 MC2.33 | length 1152.9
  Top Layer w10: v1(1744,2073) 1744,2122.54 MC2.33
  Bottom Layer w10: v1(1744,2073) 1744,2362.96 2244,2862.96 2244,2913.29 J3.33
MC2_34: J3.34 MC2.34 | length 825.3
  Top Layer w10: MC2.34 1744.09,2494.09 2030,2780 2189.45,2780 J3.34
MC2_37: J3.37 MC2.37 | length 1113.8
  Top Layer w10: v1(1681,2073) 1681,2122.54 MC2.37
  Bottom Layer w10: v1(1681,2073) 1681,2441 2087,2847 2087,2913.77 J3.37
MC2_38: J3.38 MC2.38 | length 758.9
  Top Layer w10: MC2.38 1681.1,2536.1 1975,2830 2088,2830 2125.98,2867.98 J3.38
MC2_39: J3.39 MC2.39 | length 1152.6
  Top Layer w10: v1(1649,2044) 1649,2122.03 MC2.39
  Bottom Layer w10: v1(1649,2044) 1649,2459 2001,2811 2001,2906.51 J3.39
MC2_40: J3.40 MC2.40 | length 719
  Top Layer w10: MC2.40 1649.61,2554.61 1969.02,2874.02 J3.40
MC2_41: J4.1 MC2.41 | length 1013.7
  Top Layer w10: MC2.41 1619,2121.75 v1(1619,2073)
  Bottom Layer w10: v1(1619,2073) 1619,2489 1777,2647 1777,2908.04 J4.1
MC2_42: J4.2 MC2.42 | length 555.8
  Top Layer w10: MC2.42 1618.11,2702.11 1732.28,2816.28 J4.2
MC2_43: J4.3 MC2.43 | length 1047.8
  Top Layer w10: MC2.43 1587,2122.25 v1(1587,2044)
  Bottom Layer w10: v1(1587,2044) 1587,2497 1693,2603 1693,2913.3 J4.3
MC2_44: J4.4 MC2.44 | length 536.2
  Top Layer w10: MC2.44 1586.61,2728.61 1653.54,2795.54 J4.4
MC2_45: J4.5 MC2.45 | length 970.8
  Top Layer w10: MC2.45 1556,2121.75 v1(1556,2073)
  Bottom Layer w10: v1(1556,2073) 1556,2506 1615,2565 1615,2912.56 J4.5
MC2_46: J4.6 MC2.46 | length 516.6
  Top Layer w10: MC2.46 1555.12,2749.12 1574.8,2768.8 J4.6
MC2_47: J4.7 MC2.47 | length 1008.2
  Top Layer w10: MC2.47 1524,2122.26 v1(1524,2044)
  Bottom Layer w10: J4.7 1535,2913.82 1535,2545 1524,2534 v1(1524,2044)
MC2_48: J4.8 MC2.48 | length 519.9
  Top Layer w10: J4.8 1496.06,2753.94 1523.62,2726.38 MC2.48
MC2_49: J4.9 MC2.49 | length 961.1
  Top Layer w10: MC2.49 1493,2121.76 v1(1493,2073)
  Bottom Layer w10: J4.9 1457,2913.08 1457,2833 1493,2797 v1(1493,2073)
MC2_50: J4.10 MC2.50 | length 539.4
  Top Layer w10: J4.10 1417.32,2782.68 1492.13,2707.87 MC2.50
MC2_51: J4.11 MC2.51 | length 1038.3
  Top Layer w10: MC2.51 1461,2122.27 v1(1461,2044)
  Bottom Layer w10: J4.11 1378,2913.34 1378,2842 1461,2759 v1(1461,2044)
MC2_52: J4.12 MC2.52 | length 559
  Top Layer w10: J4.12 1338.58,2811.42 1460.63,2689.37 MC2.52
MC2_53: J4.13 MC2.53 | length 999.5
  Top Layer w10: v1(1429,2073) 1429,2122.5 MC2.53
  Bottom Layer w10: J4.13 1299,2913.6 1299,2841 1429,2711 v1(1429,2073)
MC2_54: J4.14 MC2.54 | length 578.6
  Top Layer w10: J4.14 1259.84,2840.16 1429.13,2670.87 MC2.54
MC2_57: J4.17 MC2.57 | length 1038.7
  Top Layer w10: v1(1366,2073) 1366,2122.5 MC2.57
  Bottom Layer w10: J4.17 1142,2913.12 1142,2838 1366,2614 v1(1366,2073)
MC2_58: J4.18 MC2.58 | length 617.7
  Top Layer w10: J4.18 1366.14,2610.24 MC2.58
MC2_59: J4.19 MC2.59 | length 1116.5
  Top Layer w10: MC2.59 1335,2122.28 v1(1335,2044)
  Bottom Layer w10: J4.19 1063,2913.38 1063,2837 1335,2565 v1(1335,2044)
MC2_60: J4.20 MC2.60 | length 637.3
  Top Layer w10: J4.20 1334.65,2562.99 MC2.60
MC2_61: J4.21 MC2.61 | length 1078.5
  Top Layer w10: MC2.61 1304,2121.79 v1(1304,2073)
  Bottom Layer w10: J4.21 984,2913.64 984,2836 1304,2516 v1(1304,2073)
MC2_62: J4.22 MC2.62 | length 656.9
  Top Layer w10: J4.22 1303.15,2515.75 MC2.62
MC2_63: J4.23 MC2.63 | length 1155.6
  Top Layer w10: MC2.63 1272,2122.29 v1(1272,2044)
  Bottom Layer w10: J4.23 906,2912.9 906,2839 1272,2473 v1(1272,2044)
MC2_64: J4.24 MC2.64 | length 693.9
  Top Layer w10: J4.24 1120.16,2620 1150,2620 1271.65,2498.35 MC2.64
MC2_65: J4.25 MC2.65 | length 1116.9
  Top Layer w10: v1(1240,2073) 1240,2122.48 MC2.65
  Bottom Layer w10: J4.25 827,2913.16 827,2843 1240,2430 v1(1240,2073)
MC2_66: J4.26 MC2.66 | length 736.4
  Top Layer w10: J4.26 787.4,2863.6 1061,2590 1130,2590 1240.16,2479.84 MC2.66
MC2_67: J4.27 MC2.67 | length 1194.8
  Top Layer w10: MC2.67 1209,2122.3 v1(1209,2044)
  Bottom Layer w10: J4.27 748,2913.42 748,2852 1209,2391 v1(1209,2044)
MC2_68: J4.28 MC2.68 | length 770.2
  Top Layer w10: J4.28 1018.68,2564 1112,2564 1208.66,2467.34 MC2.68
MC2_69: J4.29 MC2.69 | length 1186
  Top Layer w10: MC2.69 1178,2121.8 v1(1178,2073)
  Bottom Layer w10: J4.29 669,2913.68 669,2841 740,2770 790,2770 1178,2382 v1(1178,2073)
MC2_70: J4.30 MC2.70 | length 809
  Top Layer w10: J4.30 963.94,2540 1090,2540 1177.17,2452.83 MC2.70
MC2_71: J4.31 MC2.71 | length 1288.4
  Top Layer w10: MC2.71 1146,2122.31 v1(1146,2044)
  Bottom Layer w10: J4.31 590,2913.94 590,2836.97 686.97,2740 780,2740 1146,2374 v1(1146,2044)
MC2_72: J4.32 MC2.72 | length 851.2
  Top Layer w10: J4.32 915.2,2510 1080,2510 1145.67,2444.33 MC2.72
MC2_73: J4.33 MC2.73 | length 1271.4
  Top Layer w10: v1(1114,2073) 1114,2122.46 MC2.73
  Bottom Layer w10: J4.33 511,2914.2 511,2839 640,2710 770,2710 1114,2366 v1(1114,2073)
MC2_74: J4.34 MC2.74 | length 893.5
  Top Layer w10: J4.34 866.46,2480 1070,2480 1114.17,2435.83 MC2.74
MC2_75: J4.35 MC2.75 | length 1372.7
  Top Layer w10: MC2.75 1083.11,2122.2 v1(1083.11,2044)
  Bottom Layer w10: J4.35 433,2913.46 433,2837 590,2680 760,2680 1083.11,2356.89 v1(1083.11,2044)
MC2_76: J4.36 MC2.76 | length 935.8
  Top Layer w10: J4.36 817.72,2450 1060,2450 1082.68,2427.32 MC2.76
MC2_77: J4.37 MC2.77 | length 1355
  Top Layer w10: v1(1051,2073) 1051,2122.46 MC2.77
  Bottom Layer w10: J4.37 354,2913.72 354,2840 544,2650 750,2650 1051,2349 v1(1051,2073)
MC2_79: J4.39 MC2.79 | length 1449.8
  Top Layer w10: MC2.79 1020,2122.32 v1(1020,2044)
  Bottom Layer w10: J4.39 275,2913.98 275,2850 505,2620 740,2620 1020,2340 v1(1020,2044)
NetC1_2: C1.2 J6.2 JP1.2 | length 456.7
  Top Layer w16: J6.2 235.5,1849.68 235.5,1746 235.5,1575.5 321.33,1489.67 JP1.2
SYS_CLK_MC1: J1.8 MC1.8 | length 1601.7
  Top Layer w10: MC1.8 2153.54,840.54 v1(2154,841)
  Bottom Layer w10: v1(2154,841) 2245,750 2420,750 2997.5,172.5 3152.5,172.5 3267,58 3267,0.72 J1.8
SYS_CLK_MC2: J3.11 MC2.11 | length 1550.8
  Top Layer w10: MC2.11 2091,2122.19 v1(2091,2044)
  Bottom Layer w10: v1(2091,2044) 2327,2280 2450,2280 2995,2825 3085,2825 3110,2850 3110,2913.15 J3.11
VCCO_MC1: J1.36 J2.16 MC1.36 MC1.56 TP2.1 | length 3746.5
  Top Layer w10: MC1.56 1397.64,840.64 v1(1398,841) ; MC1.36 v1@1712.6,841.4
  Top Layer w16: TP2.1 714.15,911 1398,911 ; v1(1398,841) 1398,911 ; v1@1712.6,841.4 1712.6,911 1398,911
  Bottom Layer w10: J2.16 1221,0.53 1221,351 1398,528 v1(1398,841) ; v1(1713,841) 1713,633 1830,516 1830,402 2165,67 2165,0.35 J1.36
VCCO_MC2: J3.35 J4.15 MC2.35 MC2.55 TP5.1 | length 4079.1
  Top Layer w10: MC2.55 1398,2122.27 v1(1398,2044) ; MC2.35 1713,2122.24 v1(1713,2044)
  Top Layer w16: TP5.1 354.33,2423.67 592,2186 688,2186 874,2000 1398,2000 ; v1(1398,2044) 1398,2000 ; v1(1713,2044) 1669,2000 1398,2000
  Bottom Layer w10: J4.15 1220,2913.86 1220,2840 1398,2662 v1(1398,2044) ; v1(1713,2044) 1713,2383 2165,2835 2165,2913.03 J3.35
XADC_VN: J1.10 MC1.10 | length 1625.9
  Top Layer w10: v1(2122,869) v1(2122,869) MC1.10
  Bottom Layer w10: v1(2122,869) 2122,828 2230,720 2400,720 2981,139 3120,139 3189,70 3189,-0.02 J1.10
XADC_VP: J1.12 MC1.12 | length 1521.6
  Top Layer w10: MC1.12 2090.55,840.55 v1(2091,841)
  Bottom Layer w10: v1(2091,841) 2091,819 2220,690 2391,690 2981,100 3070,100 3110,60 3110,0.24 J1.12
pads on no net: FID1.FID? FID2.FID? FID3.FID? FID4.FID? FID5.FID? FID6.FID? FID7.FID? FID8.FID? J3.5 J3.7 J3.8 J3.9 J5.3 J6.12 J6.14 MC1.81 MC1.82 MC2.81 MC2.82

## Polygon pours and split planes (outlines as drawn)
DGND on Bottom Layer "L2-DGND" (solid, remove dead copper, pour order 1000): -118.11,3031.5 -118.11,-118.11 4606.3,-118.11 4606.3,3031.5

## Other copper
Top Layer:
  region net +VDCIN: 4114.17,515.75 3972.44,515.75 3900.58,443.89 3375.89,443.89 3241.89,577.89 2380.89,577.89 2299.06,496.06 2177.17,496.06 2177.17,471.61 2255.78,393 3149.78,393 3346.46,196.32 3346.46,15.75 3362.21,0 3992.13,0 4177.17,185.04 4177.17,452.76
Bottom Layer:
  pour cut-out: 280,2840 500,2620 740,2620 1020,2340 1020,2100 2320,2100 3060,2840
  pour cut-out: 3180,75 2440,815 1150,815 410,75

## Silkscreen, mask and mechanical layers (free items; w line width, h text height)
Top Overlay:
  rectangle: 287.33,1162.58 458.33,1238.58
  rectangle: 183.33,1262.58 354.33,1338.58
  lines w4.72: 629.92,2440.95 629.92,472.44 3582.68,472.44 3582.68,2440.95 635,2440.95
  lines w8: 171.33,1250.58 171.33,1150.58 471.33,1150.58 471.33,1250.58 ; 171.33,1250.58 471.33,1250.58 ; 171.33,1250.58 171.33,1350.58 471.33,1350.58 471.33,1250.58
  lines w10: -75.67,1117.58 -75.67,1677.58 554.33,1677.58 554.33,1117.58 -75.67,1117.58
  text "JTAG" at 376,2176 h50 r270
  text "10:TDI" at -96,2142.37 h50
  text "8:TDO" at -55.54,2063.22 h50
  text "6:TCK" at -55.54,1983.22 h50
  text "BRK7010 / 20161005" at 4338.58,1925.2 h40 r90
  text "4:TMS" at -55.54,1903.22 h50
  text "2:Vref" at -88.87,1823.22 h50
  text "JTAG VREF" at 25.33,1605.58 h50
  text "1.8V" at -25.67,1270.58 h50
  text "3.3V" at -33.67,1170.58 h50
  text "+5 VDC" at 4268,638 h50
Top Solder:
  the board outline again, w1
Outline:
  the board outline again, w8
Mechanical:
  lines w10: 629.92,472.44 629.92,2440.94 3582.68,2440.94 3582.68,472.44 629.92,472.44
Fab Notes:
  drawing of 191 lines, arcs and shapes, not listed
  text "Layer" at 5264.95,3489 h50
  text "Name" at 5609.88,3489 h50
  text "Material" at 6388,3489 h50
  text "Thickness" at 7107.81,3489 h50
  text "Constant" at 7652.67,3489 h50
  text "Board Layer Stack" at 8130.89,3489 h50
  text "NOTES /  / 1. MATERIAL SELECTION: /      2-LAYER, IT-180A OR EQUIVALENT, 62 MILS +/-10% THICK /      SURFACE FINISH: ENIG (ELECTROLESS NICKEL, IMMERSION GOLD) /  / 2. SOLDER RESIST: GREEN LPI /  / 3. SILKSCREEN: WHITE / DO NOT REMOVE OVER TENTED VIAS /  / 4. LOT CODE IDENTIFICATION: ADD TO SILKSCREEN /  / 5. DRILL SIZES ARE FINISHED SIZE AFTER PLATING /  / 6. ELECTRICAL BARE BOARD TEST REQUIRED /       / 7. PANELIZATION: /      1 PIECE PER ARRAY /      0.25-IN RAILS ON ALL SIDES /      0.25-IN TAB ROUTING WITH MOUSE-BITES FOR BOARD SEPARATION /      MOUSE BITE LOCATIONS INDICATED BY ::: /       / 8. ALL 10.00-MIL VIAS MUST BE PLATED OVER FILLED VIA (POFV) /       / 9. FABRICATE TO MEET EU ROHS DIRECTIVE /  / 10. UL CERTIFICATION MARK REQUIRED" at -428,3424 h50
  text "Top Overlay" at 5609.88,3389 h50
  text "Top Solder" at 5609.88,3289 h50
  text "Solder Resist" at 6388,3289 h50
  text "0.40mil" at 7107.81,3289 h50
  text "3.5" at 7652.67,3289 h50
  text "1" at 5264.95,3189 h50
  text "Top Layer" at 5609.88,3189 h50
  text "Copper" at 6388,3189 h50
  text "1.40mil" at 7107.81,3189 h50
  text "Dielectric1" at 5609.88,3089 h50
  text "IT-180A" at 6388,3089 h50
  text "57.70mil" at 7107.81,3089 h50
  text "4.8" at 7652.67,3089 h50
  text ":::" at 3591.89,3064.89 h50
  text ":::" at 1799,3064 h50
  text "2" at 5264.95,2989 h50
  text "Bottom Layer" at 5609.88,2989 h50
  text "Copper" at 6388,2989 h50
  text "1.40mil" at 7107.81,2989 h50
  text "Bottom Solder" at 5609.88,2889 h50
  text "Solder Resist" at 6388,2889 h50
  text "0.40mil" at 7107.81,2889 h50
  text "3.5" at 7652.67,2889 h50
  text "Bottom Overlay" at 5609.88,2789 h50
  text ":::" at -155.11,1419.89 h50 r90
  text ":::" at 4672.89,1414.89 h50 r90
  text ":::" at 1790,-179 h50
  text ":::" at 3602.89,-184.11 h50
Drill Drawing:
  lines w10: 3662.52,4330.89 3676.41,4330.89 3690.29,4317 3704.18,4330.89 3718.07,4330.89 3704.18,4344.78 3718.07,4358.67 3704.18,4358.67 3690.29,4372.56 3676.41,4358.67 3662.52,4358.67 3676.41,4344.78 3662.52,4330.89 ; 3662.52,4497.56 3718.07,4497.56 3690.29,4442 3662.52,4497.56 ; 3662.52,4567 3718.07,4567 3718.07,4622.56 3662.52,4622.56 3662.52,4567 ; 3662.52,4719.78 3690.29,4692 3718.07,4719.78 3690.29,4747.56 3662.52,4719.78 ; 3662.52,4817 3662.52,4830.89 3676.41,4844.78 3662.52,4858.67 3662.52,4872.56 3676.41,4872.56 3690.29,4858.67 3704.18,4872.56 3718.07,4872.56 3718.07,4858.67 3704.18,4844.78 3718.07,4830.89 3718.07,4817 3704.18,4817 3690.29,4830.89 3676.41,4817 3662.52,4817 ; 3662.52,4942 3690.29,4955.89 3718.07,4942 3704.18,4969.78 3718.07,4997.56 3690.29,4983.67 3662.52,4997.56 3676.41,4969.78 3662.52,4942 ; 3662.52,5080.89 3676.41,5080.89 3676.41,5067 3704.18,5067 3704.18,5080.89 3718.07,5080.89 3718.07,5108.67 3704.18,5108.67 3704.18,5122.56 3676.41,5122.56 3676.41,5108.67 3662.52,5108.67 3662.52,5080.89 ; 3673.63,4336.44 3681.96,4336.44 3690.29,4328.11 3698.63,4336.44 3706.96,4336.44 3698.63,4344.78 3706.96,4353.11 3698.63,4353.11 3690.29,4361.44 3681.96,4353.11 3673.63,4353.11 3681.96,4344.78 3673.63,4336.44 ; 3673.63,4486.44 3706.96,4486.44 3690.29,4453.11 3673.63,4486.44 ; 3673.63,4578.11 3706.96,4578.11 3706.96,4611.44 3673.63,4611.44 3673.63,4578.11 ; 3673.63,4828.11 3673.63,4836.44 3681.96,4844.78 3673.63,4853.11 3673.63,4861.44 3681.96,4861.44 3690.29,4853.11 3698.63,4861.44 3706.96,4861.44 3706.96,4853.11 3698.63,4844.78 3706.96,4836.44 3706.96,4828.11 3698.63,4828.11 3690.29,4836.44 3681.96,4828.11 3673.63,4828.11 ; 3673.63,4953.11 3690.29,4961.44 3706.96,4953.11 3698.63,4969.78 3706.96,4986.44 3690.29,4978.11 3673.63,4986.44 3681.96,4969.78 3673.63,4953.11 ; 3673.63,5086.44 3681.96,5086.44 3681.96,5078.11 3698.63,5078.11 3698.63,5086.44 3706.96,5086.44 3706.96,5103.11 3698.63,5103.11 3698.63,5111.44 3681.96,5111.44 3681.96,5103.11 3673.63,5103.11 3673.63,5086.44
  lines w15: 3612.17,4279.5 9007.38,4279.5 ; 3612.17,5154.5 9007.38,5154.5 ; 4076.57,4154.5 4076.57,5279.5 ; 4579.77,4154.5 4579.77,5279.5 ; 5499.5,4154.5 5499.5,5279.5 ; 5926.4,4154.5 5926.4,5279.5 ; 6543.23,4154.5 6543.23,5279.5 ; 7796.19,4154.5 7796.19,5279.5 ; 8293.06,4154.5 8293.06,5279.5 ; 3612.17,4154.5 9007.38,4154.5 9007.38,5279.5 3612.17,5279.5 3612.17,4154.5
  text "Symbol" at 3687.17,5192 h60
  text "Count" at 4114.07,5192 h60
  text "Hole Size" at 4617.27,5192 h60
  text "Plated" at 5537,5192 h60
  text "Hole Type" at 5963.9,5192 h60
  text "Drill Layer Pair" at 6580.73,5192 h60
  text "Via/Pad" at 7833.69,5192 h60
  text "Technology" at 8330.56,5192 h60
  text "81" at 4114.07,5067 h50
  text "10.00mil (0.254mm)" at 4617.27,5067 h50
  text "PTH" at 5537,5067 h50
  text "Round" at 5963.9,5067 h50
  text "Top Layer - Bottom Layer" at 6580.73,5067 h50
  text "Via" at 7833.69,5067 h50
  text "v51h25" at 8330.56,5067 h50
  text "174" at 4114.07,4942 h50
  text "31.50mil (0.800mm)" at 4617.27,4942 h50
  text "PTH" at 5537,4942 h50
  text "Round" at 5963.9,4942 h50
  text "Top Layer - Bottom Layer" at 6580.73,4942 h50
  text "Pad" at 7833.69,4942 h50
  text "(Mixed)" at 8330.56,4942 h50
  text "3" at 4114.07,4817 h50
  text "40.00mil (1.016mm)" at 4617.27,4817 h50
  text "PTH" at 5537,4817 h50
  text "Round" at 5963.9,4817 h50
  text "Top Layer - Bottom Layer" at 6580.73,4817 h50
  text "Pad" at 7833.69,4817 h50
  text "(Mixed)" at 8330.56,4817 h50
  text "4" at 4114.07,4692 h50
  text "40.16mil (1.020mm)" at 4617.27,4692 h50
  text "PTH" at 5537,4692 h50
  text "Round" at 5963.9,4692 h50
  text "Top Layer - Bottom Layer" at 6580.73,4692 h50
  text "Pad" at 7833.69,4692 h50
  text "c102h102" at 8330.56,4692 h50
  text "3" at 4114.07,4567 h50
  text "59.06mil (1.500mm)" at 4617.27,4567 h50
  text "PTH" at 5537,4567 h50
  text "Round" at 5963.9,4567 h50
  text "Top Layer - Bottom Layer" at 6580.73,4567 h50
  text "Pad" at 7833.69,4567 h50
  text "c225h150" at 8330.56,4567 h50
  text "10" at 4114.07,4442 h50
  text "65.00mil (1.651mm)" at 4617.27,4442 h50
  text "PTH" at 5537,4442 h50
  text "Round" at 5963.9,4442 h50
  text "Top Layer - Bottom Layer" at 6580.73,4442 h50
  text "Pad" at 7833.69,4442 h50
  text "c254h165" at 8330.56,4442 h50
  text "8" at 4114.07,4317 h50
  text "98.43mil (2.500mm)" at 4617.27,4317 h50
  text "PTH" at 5537,4317 h50
  text "Round" at 5963.9,4317 h50
  text "Top Layer - Bottom Layer" at 6580.73,4317 h50
  text "Pad" at 7833.69,4317 h50
  text "c500h250" at 8330.56,4317 h50
  text "283 Total" at 4114.07,4192 h50
Doc-Assy-Top:
  lines w2.94: -926.35,-90.51 -808.65,-90.51 ; -926.35,1160.03 -808.65,1160.03 ; -926.35,2410.57 -808.65,2410.57 ; 574.3,-1223.35 574.3,-1105.65 ; 574.3,3425.71 574.3,3543.4 ; 2192.64,-1223.35 2192.64,-1105.65 ; 2192.64,3425.71 2192.64,3543.4 ; 2663.43,-1223.35 5311.62,-1223.35 ; 3430.32,-1105.74 3430.32,-686.1 5193.93,-686.1 ; 3430.32,-964.13 5193.93,-964.13 ; 3696.46,-1105.74 3696.46,-964.13 ; 3810.98,-1223.35 3810.98,-1105.65 ; 3810.98,3425.71 3810.98,3543.4 ; 4109.38,-1105.74 4109.38,-964.13 ; 4191.94,-963.95 4191.94,-686.1 ; 4719.77,-1105.74 4719.77,-964.13 ; 5193.93,-90.51 5311.62,-90.51 ; 5193.93,1160.03 5311.62,1160.03 ; 5193.93,2410.57 5311.62,2410.57 ; 5311.62,-1223.35 -926.35,-1223.35 -926.35,3543.4 5311.62,3543.4 5311.62,-1223.35 ; -808.65,-1105.65 5193.93,-1105.65 5193.93,3425.71 -808.65,3425.71 -808.65,-1105.65
  text "1" at -248.8,3465.81 h41.19
  text "2" at 1369.93,3465.81 h41.19
  text "3" at 2985.33,3465.81 h41.19
  text "4" at 4604.27,3465.81 h41.19
  text "A" at -884.07,2982.58 h41.19
  text "A" at 5239.92,2982.58 h41.19
  text "B" at -884.07,1732.04 h41.19
  text "B" at 5239.92,1732.04 h41.19
  text "C" at -884.07,481.5 h41.19
  text "C" at 5239.92,481.5 h41.19
  text "TITLE:" at 3476.02,-732.44 h26.48
  text "Opal Kelly" at 4238.27,-750.97 h41.19
  text "D" at -884.07,-766.09 h41.19
  text "D" at 5239.92,-766.09 h41.19
  text "13500 SW 72nd Ave Suite 100" at 4238.27,-820.48 h41.19
  text "Portland, OR 97223" at 4238.27,-878.4 h41.19
  text "BRK7010 / Assembly Drawing" at 3495.07,-879.39 h41.19
  text "www.opalkelly.com" at 4238.27,-936.32 h41.19
  text "(Top)" at 3495.07,-946.48 h41.19
  text "REV:" at 3463.07,-1003.37 h26.48
  text "SIZE:" at 3732.37,-1003.37 h26.48
  text "ENGINEER:" at 4145.28,-1003.37 h26.48
  text "DATE:" at 4755.68,-1003.37 h26.48
  text "A01" at 3498.98,-1075.18 h41.19
  text "ANSI A" at 3768.27,-1075.18 h41.19
  text "NDK" at 4181.19,-1075.18 h41.19
  text ".PRINT_DATE" at 4791.59,-1075.18 h41.19
  text "1" at -248.8,-1186.95 h41.19
  text "2" at 1369.93,-1186.95 h41.19
  text "3" at 2985.33,-1186.95 h41.19
  text "4" at 4604.27,-1186.95 h41.19
Doc-Assy-Bot:
  lines w2.94: -927.05,-90.86 -809.33,-90.86 ; -927.05,1159.88 -809.33,1159.88 ; -927.05,2410.62 -809.33,2410.62 ; -809.33,-964.48 953.77,-964.48 ; -809.33,-686.53 953.77,-686.53 953.77,-1106.05 ; -335.32,-1106.05 -335.32,-964.48 ; 192.37,-964.3 192.37,-686.53 ; 274.91,-1106.05 274.91,-964.48 ; 573.84,-1223.88 573.84,-1106.16 ; 573.84,3425.92 573.84,3543.64 ; 687.7,-1106.05 687.7,-964.48 ; 1721.57,-1223.88 -927.05,-1223.88 ; 2192.44,-1223.88 2192.44,-1106.16 ; 2192.44,3425.92 2192.44,3543.64 ; 3811.04,-1223.88 3811.04,-1106.16 ; 3811.04,3425.92 3811.04,3543.64 ; 5194.21,-90.86 5311.93,-90.86 ; 5194.21,1159.88 5311.93,1159.88 ; 5194.21,2410.62 5311.93,2410.62 ; -927.05,-1223.88 5311.93,-1223.88 5311.93,3543.64 -927.05,3543.64 -927.05,-1223.88 ; -809.33,-1106.16 5194.21,-1106.16 5194.21,3425.92 -809.33,3425.92 -809.33,-1106.16
  text "4" at -219.58,3466.03 h41.2
  text "3" at 1399.62,3466.03 h41.2
  text "2" at 3015.28,3466.03 h41.2
  text "1" at 4634.27,3466.03 h41.2
  text "A" at -855.33,2982.72 h41.2
  text "A" at 5269.64,2982.72 h41.2
  text "B" at -855.33,1731.98 h41.2
  text "B" at 5269.64,1731.98 h41.2
  text "C" at -855.33,481.24 h41.2
  text "C" at 5269.64,481.24 h41.2
  text "TITLE:" at 908.08,-732.86 h26.47
  text "Opal Kelly" at 146.05,-751.39 h41.18
  text "D" at -855.33,-766.55 h41.2
  text "D" at 5269.64,-766.55 h41.2
  text "13500 SW 72nd Ave Suite 100" at 146.05,-820.87 h41.18
  text "Portland, OR 97223" at 146.05,-878.78 h41.18
  text "BRK7010 / Assembly Drawing" at 889.04,-879.77 h41.18
  text "www.opalkelly.com" at 146.05,-936.68 h41.18
  text "(Bottom)" at 889.04,-946.84 h41.18
  text "DATE:" at -371.21,-1003.71 h26.47
  text "ENGINEER:" at 239.01,-1003.71 h26.47
  text "SIZE:" at 651.81,-1003.71 h26.47
  text "REV:" at 921.02,-1003.71 h26.47
  text ".PRINT_DATE" at -407.11,-1075.5 h41.18
  text "NDK" at 203.12,-1075.5 h41.18
  text "ANSI A" at 615.91,-1075.5 h41.18
  text "A01" at 885.13,-1075.5 h41.18
  text "4" at -219.58,-1187.48 h41.2
  text "3" at 1399.62,-1187.48 h41.2
  text "2" at 3015.28,-1187.48 h41.2
  text "1" at 4634.27,-1187.48 h41.2
Doc-Fab:
  lines w5: -978.46,164.75 -778.46,164.75 ; -978.46,2289.75 -778.46,2289.75 ; -978.46,4414.75 -778.46,4414.75 ; 1571.54,-1760.25 1571.54,-1560.25 ; 1571.54,6139.75 1571.54,6339.75 ; 4321.54,-1760.25 4321.54,-1560.25 ; 4321.54,6139.75 4321.54,6339.75 ; 4882.35,-1560.25 4882.35,-504.11 9421.54,-504.11 ; 4882.35,-694.11 6642.35,-694.11 ; 4882.35,-584.11 6642.35,-584.11 ; 5121.54,-1760.25 9621.54,-1760.25 ; 5302.35,-1560.25 5302.35,-504.11 ; 6642.35,-1560.25 6642.35,-504.11 ; 6642.35,-1364.11 9422.35,-1364.11 ; 6642.35,-924.11 9421.54,-924.11 ; 7071.54,-1760.25 7071.54,-1560.25 ; 7071.54,6139.75 7071.54,6339.75 ; 7202.35,-1560.25 7202.35,-1364.11 ; 7882.35,-1364.11 7882.35,-924.11 ; 8532.35,-1560.25 8532.35,-1364.11 ; 9421.54,164.75 9621.54,164.75 ; 9421.54,2289.75 9621.54,2289.75 ; 9421.54,4414.75 9621.54,4414.75 ; 9621.54,-1760.25 -978.46,-1760.25 -978.46,6339.75 9621.54,6339.75 9621.54,-1760.25 ; -778.46,-1560.25 9421.54,-1560.25 9421.54,6139.75 -778.46,6139.75 -778.46,-1560.25
  text "1" at 172.88,6207.9 h70
  text "2" at 2923.54,6207.9 h70
  text "3" at 5668.54,6207.9 h70
  text "4" at 8419.55,6207.9 h70
  text "A" at -906.61,5386.75 h70
  text "A" at 9499.69,5386.75 h70
  text "B" at -906.61,3261.75 h70
  text "B" at 9499.69,3261.75 h70
  text "C" at -906.61,1136.75 h70
  text "C" at 9499.69,1136.75 h70
  text "REVISION:" at 4911.35,-564.11 h40
  text "DESCRIPTION:" at 5341.35,-564.11 h40
  text "PART NUMBER:" at 6722.35,-644.11 h75
  text "20161005" at 4912.35,-664.11 h50
  text "Initial Release" at 5342.35,-664.11 h50
  text "BRK7010PCB-20161005" at 6742.35,-924.11 h130
  text "D" at -906.61,-983.25 h70
  text "D" at 9499.69,-983.25 h70
  text "TITLE:" at 6702.35,-1004.11 h40
  text "Opal Kelly" at 7942.35,-1024.11 h60
  text "13500 SW 72nd Ave Suite 100" at 7942.35,-1124.11 h60
  text "Portland, OR 97223" at 7942.35,-1224.11 h60
  text "XEM7010 / Fabrication Drawing" at 6742.35,-1304.11 h60
  text "www.opalkelly.com" at 7942.35,-1324.11 h60
  text "SIZE:" at 6702.35,-1424.11 h40
  text "ENGINEER:" at 7262.35,-1424.11 h40
  text "DATE:" at 8582.35,-1424.11 h40
  text "ANSI A" at 6742.35,-1524.11 h60
  text "NDK" at 7302.35,-1524.11 h60
  text ".PRINT_DATE" at 8622.35,-1524.11 h60
  text "1" at 172.88,-1698.4 h70
  text "2" at 2923.54,-1698.4 h70
  text "3" at 5668.54,-1698.4 h70
  text "4" at 8419.55,-1698.4 h70

## Dimensions
-118.11,-118.11 to -118.11,3031.5 on Dimensions
-118.11,-118.11 to 4606.3,-118.11 on Dimensions

## Text inside footprints (layer, text, board x,y; h text height)
*1: Top Overlay "Opal Kelly" at 4320.96,1300.75 h75 r90
J1: Top Overlay "40" at 1941,-53 h29.53; Top Overlay "39" at 1939,23 h29.53; Top Overlay "2" at 3608,-54 h29.53; Top Overlay "1" at 3614,28 h29.53
J2: Top Overlay "1" at 1792,28 h29.53; Top Overlay "2" at 1790,-53 h29.53; Top Overlay "39" at 132,27 h29.53; Top Overlay "40" at 134,-53 h29.53
J3: Top Overlay "40" at 1943,2860 h29.53; Top Overlay "39" at 1944,2939 h29.53; Top Overlay "2" at 3598,2861 h29.53; Top Overlay "1" at 3600,2940 h29.53
J4: Top Overlay "1" at 1790,2941 h29.53; Top Overlay "2" at 1791,2861 h29.53; Top Overlay "39" at 131,2939 h29.53; Top Overlay "40" at 131,2862 h29.53
J6: Top Overlay "1" at 302,1787 h29.53 r270; Top Overlay "2" at 221,1792 h29.53 r270; Top Overlay "13" at 301,2424 h29.53 r270; Top Overlay "14" at 220,2424 h29.53 r270
JP1: Top Overlay "3" at 486.33,1404.58 h50; Top Overlay "1" at 141.33,1409.58 h50